# Altium PCB PCB2.PcbDoc
Units mm, origin at the board's own origin, x right, y up, seen from the top; angles counter-clockwise.
Board outline 62.23 x 77.09 mm, 2 copper layers (Top Layer, Bottom Layer); 44 components, 54 nets, 190 pads, 29 vias.
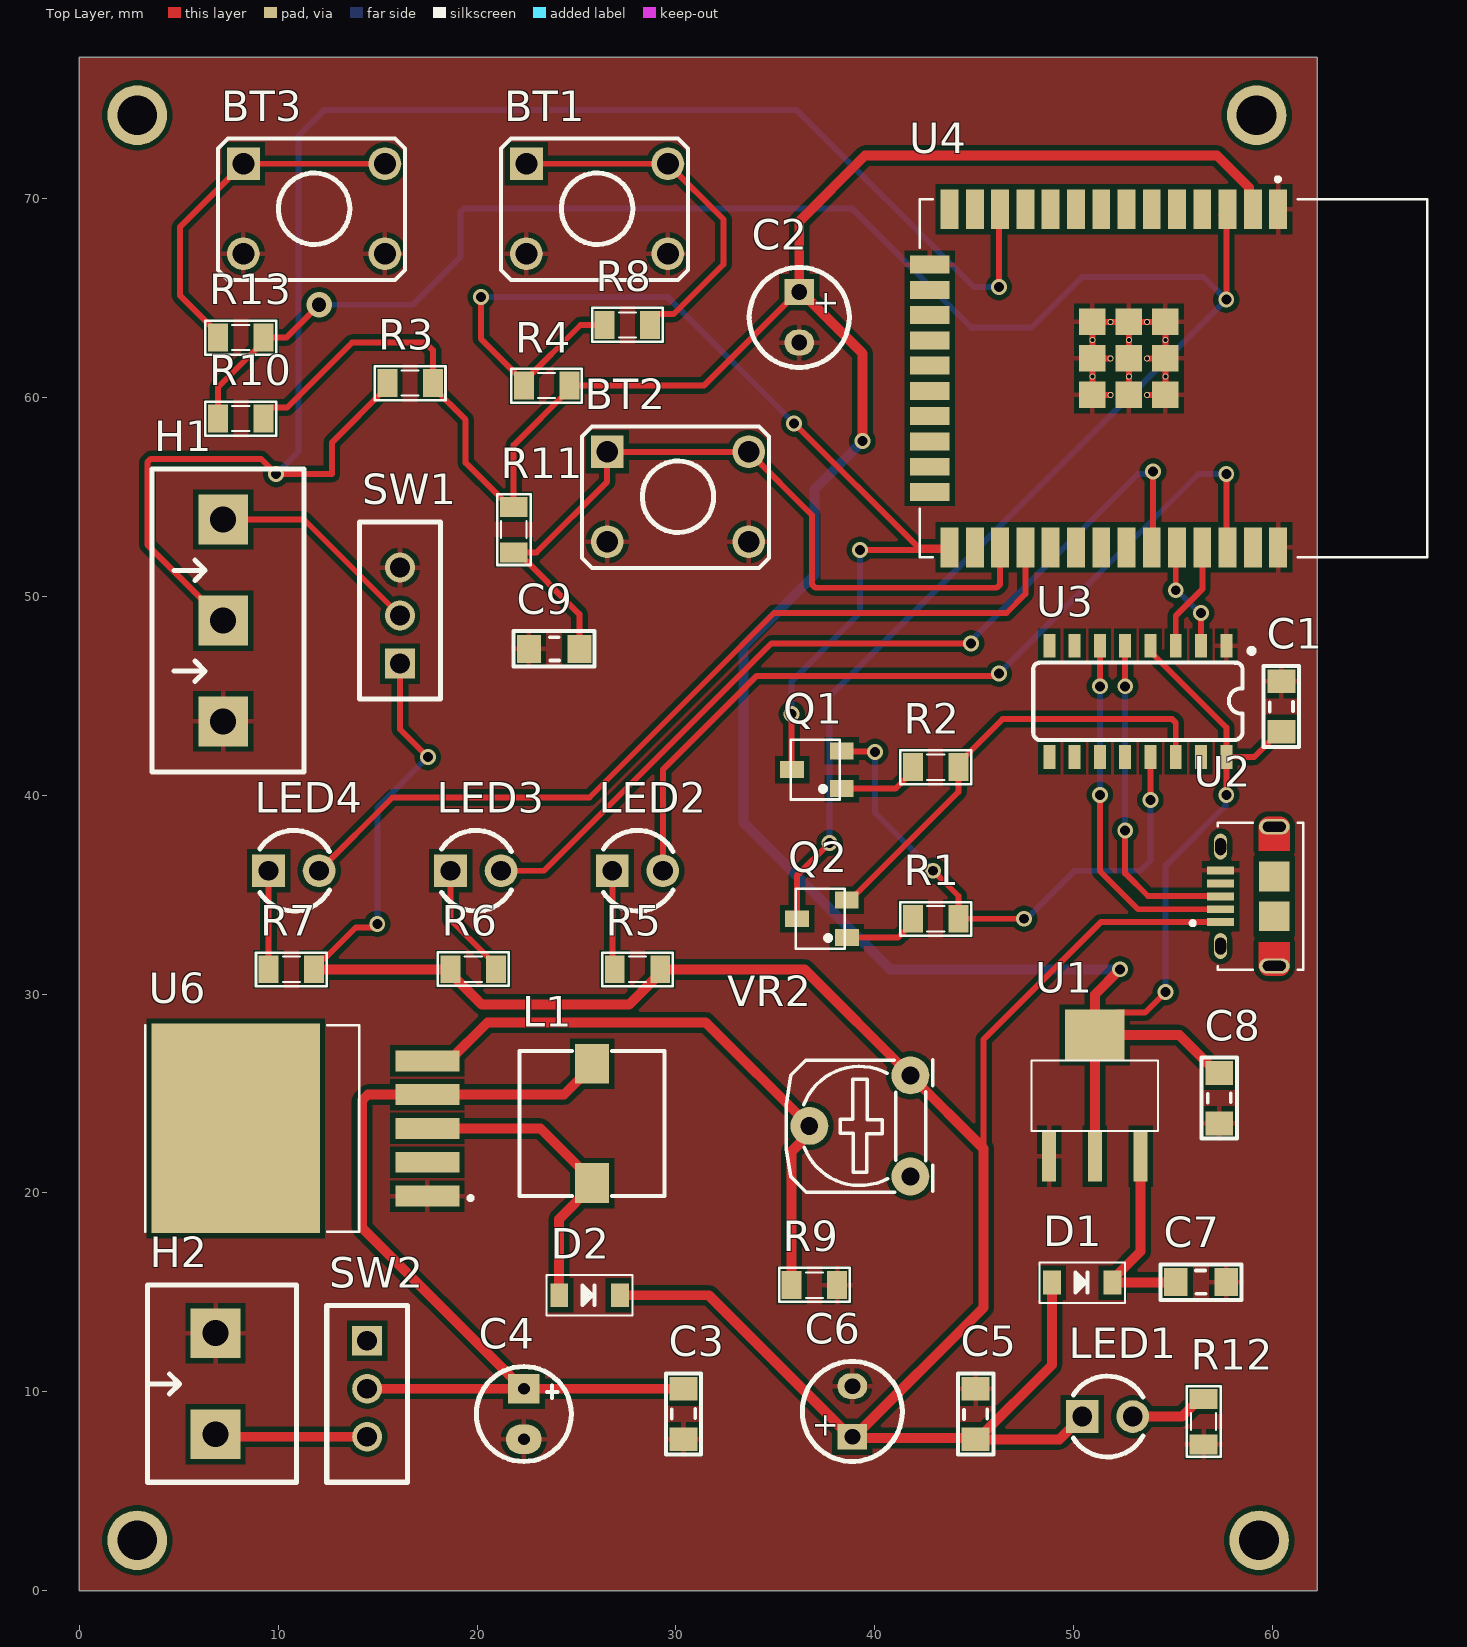
[diagram p0: Top Layer view]
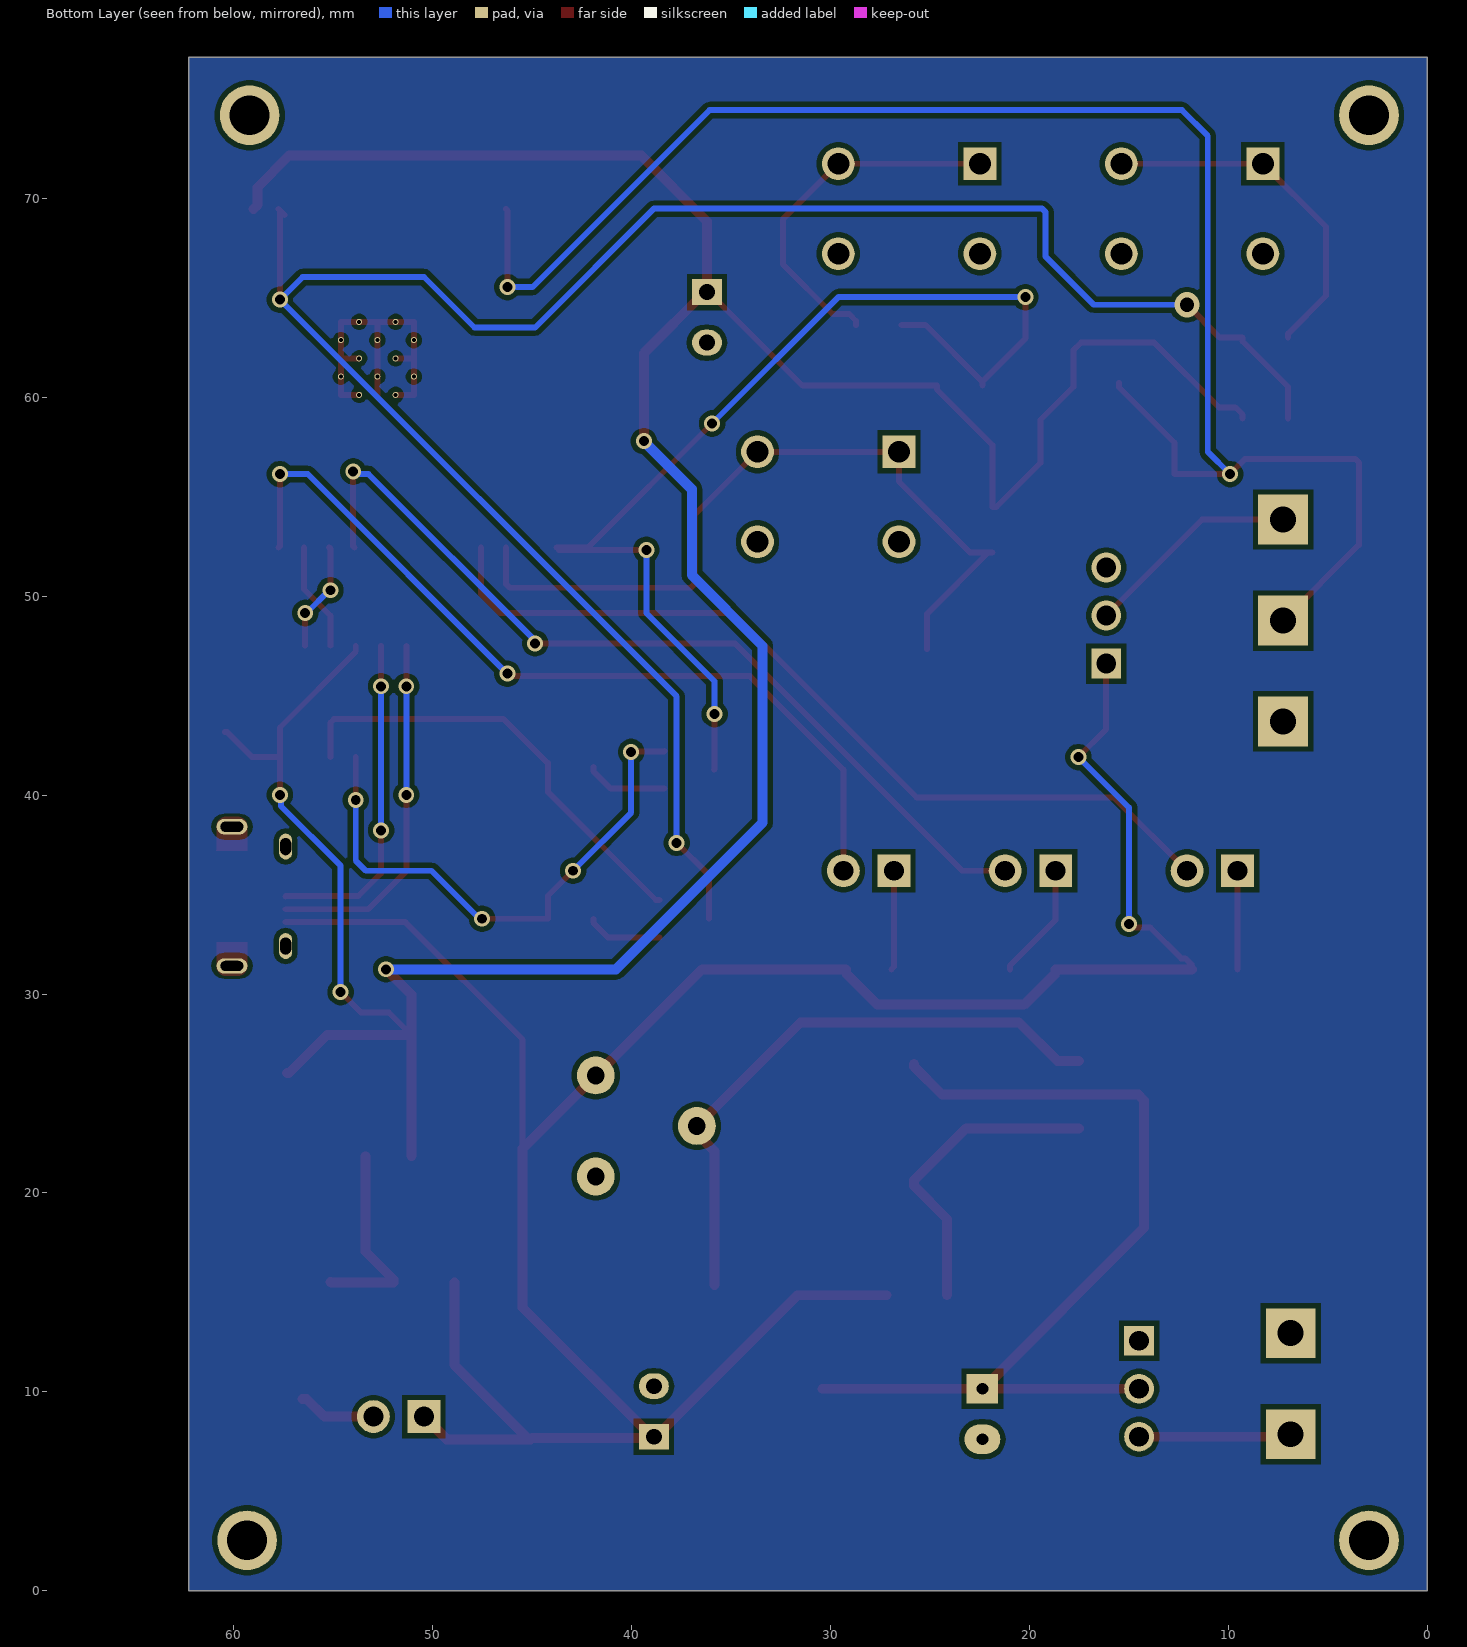
[diagram p1: Bottom Layer view, seen from below]
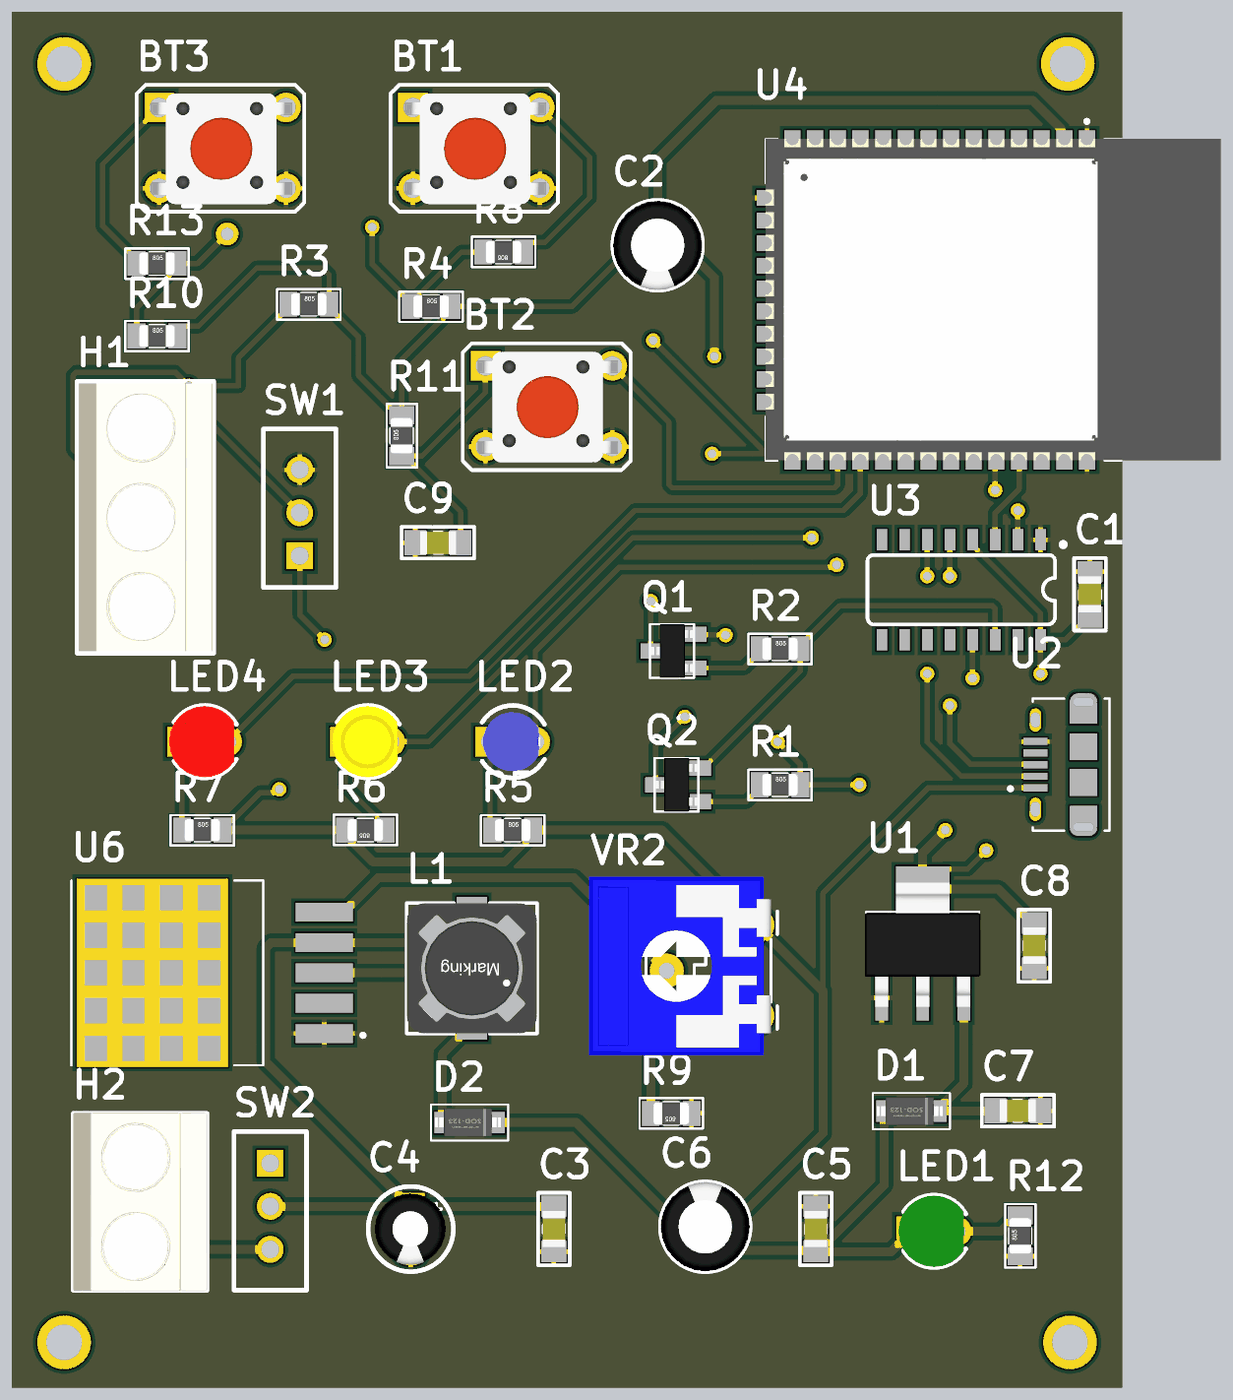
[diagram p2: 3D render of the assembled board from above, using the file's embedded part models]

## Layer stack, top to bottom
Top Solder: solder mask 0.0102, Solder Resist, Dk 3.5
Top Layer: signal copper 0.0356
Dielectric 1: dielectric 0.32, FR-4, Dk 4.8
Bottom Layer: signal copper 0.0356
Bottom Solder: solder mask 0.0102, Solder Resist, Dk 3.5

## Board outline
0,0 62.23,0 62.23,77.089 0,77.089

## Design rules (kind name [scope] priority, off if disabled: settings)
Clearance [All] p1: gap=0.254 ignorepadtopadclearanceinfootprint=FALSE except(0: Arc-Hole Track-Hole SMDPad-Hole THPad-Hole Via-Hole Fill-Hole Poly-Hole Region-Hole Text-Hole)
PolygonConnect [All] p1: connectstyle=Relief reliefconductorwidth=0.254 reliefentries=4 polygonreliefangle="90 Angle" airgapwidth=0.254
RoutingVias [All] p1: holewidth=0.711 width=1.27 viastyle="Through Hole" minholewidth=0.711 minwidth=1.27 maxholewidth=0.711 maxwidth=1.27
SolderMaskExpansion [All] p1: expansion=0.102 istentingtop=FALSE
Width [All] p1: maxlimit=0.8 minlimit=0.3 preferedwidth=0.5
30 further rules are at their usual default settings.

## Components (designator, comment, footprint, x,y, rotation, side; value= is the part's Value field where it differs from the comment)
BT1 "BT" "BUTTON 4 PIN" 26.035,69.469 r0 top value="SW chip 2 pin"
BT2 "BT" "BUTTON 4 PIN" 30.099,54.991 r0 top value="SW chip 2 pin"
BT3 "BT" "BUTTON 4 PIN" 11.811,69.469 r0 top value="SW chip 2 pin"
C1 "100nF" CAP_0805 60.452,44.45 r270 top value=33p
C2 "100uF" C5mm 36.195,64.008 r270 top
C3 "1uF" CAP_0805 30.353,8.89 r90 top value=33p
C4 "47uF" C3MM 22.352,8.89 r270 top
C5 "1uF" CAP_0805 45.085,8.89 r270 top value=33p
C6 "220uF" C5mm 38.862,9.017 r90 top
C7 "10uF" CAP_0805 56.388,15.494 r180 top value=33p
C8 "10uF" CAP_0805 57.277,24.765 r90 top value=33p
C9 "10uF" CAP_0805 23.876,47.371 r0 top value=33p
D1 "1N5822" DIO-SMD-123 50.419,15.494 r180 top value="Diode c?m 1N5408"
D2 "1N5822" DIO-SMD-123 25.654,14.859 r180 top value="Diode c?m 1N5408"
H1 "Header_3" KF3-5.08 7.239,53.848 r270 top
H2 "Header_2" KF2-5.08 6.858,10.414 r90 top
L1 "33uH" L-SMD-M-7.3x4.5 25.781,23.495 r0 top
LED1 "GREEN" LED_GREEN_3MM 51.689,8.763 r0 top value="LED 3 ly Single Colour"
LED2 "BLUE" LED_BLUE_3MM 28.067,36.195 r0 top value="LED 3 ly Single Colour"
LED3 "YELLOW" LED_YELLOW_3MM 19.939,36.195 r0 top value="LED 3 ly Single Colour"
LED4 "RED" LED_RED_3MM 10.795,36.195 r0 top value="LED 3 ly Single Colour"
Q1 "2N222" SOT23D 37.084,41.275 r90 top value=C1815
Q2 "2N222" SOT23D 37.338,33.782 r90 top value=C1815
R1 "12k" RES-SMD-0805 43.053,33.782 r0 top
R2 "12k" RES-SMD-0805 43.053,41.402 r0 top
R3 "4.7k" RES-SMD-0805 16.637,60.706 r0 top
R4 "12k" RES-SMD-0805 23.495,60.579 r0 top
R5 "1k" RES-SMD-0805 28.067,31.242 r0 top
R6 "1k" RES-SMD-0805 19.812,31.242 r180 top
R7 "1k" RES-SMD-0805 10.668,31.242 r0 top
R8 "470" RES-SMD-0805 27.559,63.627 r180 top
R9 "1k" RES-SMD-0805 36.957,15.367 r180 top
R10 "12k" RES-SMD-0805 8.128,58.928 r0 top
R11 "4.7k" RES-SMD-0805 21.844,53.34 r90 top
R12 "1k" RES-SMD-0805 56.515,8.509 r90 top
R13 "470" RES-SMD-0805 8.128,62.992 r0 top
SW1 "500SSP1S2M2QEA" 3pin 16.129,51.308 r90 top
SW2 "500SSP1S2M2QEA" 3pin 14.478,7.874 r270 top
U1 "LM1117" LM1117-SOP 51.054,23.114 r0 top
U2 "Micro_USB" AMPHENOL_10118194-0001LF 60.071,34.909 r90 top
U3 "CH340C" SO016 53.213,44.704 r180 top
U4 "ESP32-WROOM-32" MODULE_ESP32-WROOM-32 55.002,60.948 r270 top
U6 "XL6009" DPAK170P1435X465-6N 11.374,23.241 r180 top
VR2 "10K" VR 41.783,20.828 r90 top value="VR 10K"

## Footprints (in the part's own frame and the unit in brackets; to place one, negate y for a bottom-side part, rotate by r counter-clockwise, add the part's x,y. Pads: shape width x height; smd on the part's side, far side on the other; paste and mask are expansions set on the pad)
3pin [mm]
  rect 1.5x1.5 hole 1: 1(-4.7,0)
  round 1.5 hole 1: 2(-2.286,0) 3(0.127,0)
  silkscreen extent -6.48,-2.03 2.41,2.03
AMPHENOL_10118194-0001LF [mm]
  rect 0.4x1.35 smd: 1(-1.3,2.7) 2(-0.65,2.7) 3(0,2.7) 4(0.65,2.7) 5(1.3,2.7)
  oval 1.3x0.65 hole 0.55 slot 0.85 at 0 deg: S1(-2.5,2.7) S2(2.5,2.7)
  oval 0.775x1.55 hole 0.5 slot 1.15 at 90 deg: S3(-3.5,0) S6(3.5,0)
  rect 1.5x1.55 smd: S4(-1,0) S5(1,0)
  Top Layer region: 192 vertices and 0 holes, not listed, extent -4,-0.775 -2.3,0.78
  Top Layer region: 192 vertices and 0 holes, not listed, extent 2.3,-0.78 4,0.775
  silkscreen extent -3.7,-1.45 3.7,4.2
"BUTTON 4 PIN" [mil] "BUTTON SMORE 280mil x 178mil"
  rect 65x65 hole 43.31: 1(-140,89)
  round 65 hole 43.31: 1(140,89) 2(-140,-89) 2(140,-89)
  silkscreen extent -190,-141 180,139, body extent -159,-124 153,120, height 276
C3MM [mm]
  rect 1.5x1.58 hole 0.6: 1(-1.27,0)
  oval 1.5x1.8 hole 0.6: 2(1.27,0)
  silkscreen extent -2.39,-2.39 2.39,2.39, body extent -2,-2.03 1.99,1.97, height 7.01
C5mm [mm]
  rect 1.3x1.5 hole 0.8: 1(-1.27,0)
  oval 1.3x1.5 hole 0.8: 2(1.27,0)
  silkscreen extent -2.51,-2.51 2.51,2.51, body extent -2.5,-2.5 2.49,2.5, height 11.01
CAP_0805 [mm]
  rect 1.2x1.4 smd: 1(-1.27,-0.025) 2(1.27,-0.025)
  silkscreen extent -2.03,-0.91 2.03,0.86, body extent -1.01,-0.66 1.01,0.61, height 0.61
DIO-SMD-123 [mm]
  rect 0.9x1.2 smd: 1(1.524,0) 2(-1.524,0)
  silkscreen extent -2.16,-1.02 2.16,1.02, body extent -1.76,-0.8 1.94,0.8, height 1.25
DPAK170P1435X465-6N [mm]
  rect 3.21x1.05 smd: 1(-6.13,3.4) 2(-6.13,1.7) 3(-6.13,0) 4(-6.13,-1.7) 5(-6.13,-3.4)
  rect 8.46x10.53 smd paste-6: 6(3.5,0)
  silkscreen extent -8.4,-5.18 8.05,5.18
KF2-5.08 [mm]
  rect 2.5x2.5 hole 1.3: 1(-2.54,0) 2(2.54,0)
  silkscreen extent -4.95,-4.08 4.95,3.43, body extent -5,-4.07 5,3.43, height 10
KF3-5.08 [mm]
  rect 2.5x2.5 hole 1.3: 1(0,0) 2(5.08,0) 3(10.147,0)
  silkscreen extent -2.54,-3.58 12.7,4.06, body extent -2.42,-3.51 12.58,3.99, height 10
L-SMD-M-7.3x4.5 [mm] "WE-PDA SMD Shielded Power Inductor, 7345"
  rect 1.7x2 smd: 1(0,3) 2(0,-3)
  silkscreen extent -3.65,-3.65 3.65,3.65, body extent -3.65,-3.65 3.65,3.65, height 4.05
LED_BLUE_3MM [mil]
  rect 65x65 hole 39.37: 1(-50,0)
  round 65 hole 39.37: 2(50,0)
  silkscreen extent -67,-80 70,80, body extent -66,-65 61,65, height 196
LED_GREEN_3MM [mil]
  rect 65x65 hole 39.37: 1(-50,0)
  round 65 hole 39.37: 2(50,0)
  silkscreen extent -67,-80 70,80, body extent -79,-79 66,79, height 182
LED_RED_3MM [mil]
  rect 65x65 hole 39.37: 1(-50,0)
  round 65 hole 39.37: 2(50,0)
  silkscreen extent -67,-80 70,80, body extent -79,-79 66,79, height 182
LED_YELLOW_3MM [mil]
  rect 65x65 hole 39.37: 1(-50,0)
  round 65 hole 39.37: 2(50,0)
  silkscreen extent -67,-80 70,80, body extent -79,-79 66,79, height 182
LM1117-SOP [mm]
  rect 0.7x2.54 smd: 1(-2.3,-1.27) 2(0,-1.27) 3(2.3,-1.27)
  rect 3x2.54 smd: 2(0,4.826)
  silkscreen extent -3.17,0 3.17,3.56, body extent -3.25,-1.78 3.25,5.18, height 1.68
MODULE_ESP32-WROOM-32 [mm]
  rect 2x0.9 smd: 1(-8.5,5.26) 2(-8.5,3.99) 3(-8.5,2.72) 4(-8.5,1.45) 5(-8.5,0.18) 6(-8.5,-1.09) 7(-8.5,-2.36) 8(-8.5,-3.63) 9(-8.5,-4.9) 10(-8.5,-6.17) 11(-8.5,-7.44) 12(-8.5,-8.71) 13(-8.5,-9.98) 14(-8.5,-11.25) 25(8.5,-11.25) 26(8.5,-9.98) 27(8.5,-8.71) 28(8.5,-7.44) 29(8.5,-6.17) 30(8.5,-4.9) 31(8.5,-3.63) 32(8.5,-2.36) 33(8.5,-1.09) 34(8.5,0.18) 35(8.5,1.45) 36(8.5,2.72) 37(8.5,3.99) 38(8.5,5.26)
  rect 0.9x2 smd: 15(-5.715,-12.25) 16(-4.445,-12.25) 17(-3.175,-12.25) 18(-1.905,-12.25) 19(-0.635,-12.25) 20(0.635,-12.25) 21(1.905,-12.25) 22(3.175,-12.25) 23(4.445,-12.25) 24(5.715,-12.25)
  rect 1.33x1.33 smd: 39_1(-2.835,-0.405) 39_2(-1,-0.405) 39_3(0.835,-0.405) 39_4(-2.835,-2.24) 39_5(-1,-2.24) 39_6(0.835,-2.24) 39_7(-2.835,-4.075) 39_8(-1,-4.075) 39_9(0.835,-4.075)
  round 0.3 hole 0.2: 39_10(-1.917,-0.405) 39_11(-0.082,-0.405) 39_12(-2.835,-1.322) 39_13(-1,-1.322) 39_14(0.835,-1.322) 39_15(-1.917,-2.24) 39_16(-0.082,-2.24) 39_17(-2.835,-3.157) 39_18(-1,-3.157) 39_19(0.835,-3.157) 39_20(-1.917,-4.075) 39_21(-0.082,-4.075)
  silkscreen extent -10.1,-12.75 9,12.75, body extent -9.02,-12.75 8.98,12.75, height 3.2
RES-SMD-0805 [mil]
  rect 39.37x55 smd: 1(-45,0) 2(45,0)
  silkscreen extent -70,-34 70,33, body extent -39,-25 39,25, height 31
SO016 [mm]
  rect 0.6x1.2 smd: 1(-4.445,-2.8) 2(-3.175,-2.8) 3(-1.905,-2.8) 4(-0.635,-2.8) 5(0.635,-2.8) 6(1.905,-2.8) 7(3.175,-2.8) 8(4.445,-2.8) 9(4.445,2.8) 10(3.175,2.8) 11(1.905,2.8) 12(0.635,2.8) 13(-0.635,2.8) 14(-1.905,2.8) 15(-3.175,2.8) 16(-4.445,2.8)
  silkscreen extent -5.84,-2.67 5.26,1.95
SOT23D [mm] "SOT 23C - 1-3-2 - BCE"
  rect 0.85x1.2 smd: 1(-0.95,-1.25) 2(0.94,-1.245) 3(0,1.25)
  silkscreen extent -1.5,-1.14 1.5,1.32, body extent -1.5,-1.17 1.5,1.33, height 1.06
VR [mil] "Resistor Variable"
  round 75 hole 35: 1(0,0) 2(100,200) 3(200,0)
  silkscreen extent -31,-44 231,246, body extent -87,-30 307,372, height 165

## Part data
BT1 BT2 BT3: library part SW2, "Switch button 2 pin"
C1 C3 C5 C7 C8 C9: library part CapSMD, "Capacitor", LatestRevisionDate=17-Jul-2002, LatestRevisionNote="Re-released for DXP Platform.", PackageReference=RAD-0.3, Published=8-Jun-2000, Publisher="Altium Limited"
C2 C4 C6: library part "Cap Pol", "Polarized Capacitor (Axial)", LatestRevisionDate=17-Jul-2002, LatestRevisionNote="Re-released for DXP Platform.", PackageReference=POLAR0.8, Published=8-Jun-2000, Publisher="Altium Limited"
D1 D2: "Schottky Rectifiers"
H1: library part KF3, Manufacturer="Würth Elektronik eiSos GmbH", partNo=691103110003, ComponentLink1 Description=Manufacturer, ComponentLink1URL=http://www.we-online.com, ComponentLink2 Description=Datasheet, ComponentLink2URL=http://katalog.we-online.de/em/datasheet/6911031100xx.pdf, Created by="Karrer Zheng", Created Date="29 October 2013", NoPins=3
H2: library part KF2, Manufacturer="Würth Elektronik eiSos GmbH", partNo=691103110002, ComponentLink1 Description=Manufacturer, ComponentLink1URL=http://www.we-online.com, ComponentLink2 Description=Datasheet, ComponentLink2URL=http://katalog.we-online.de/em/datasheet/6911031100xx.pdf, Created by="Karrer Zheng", Created Date="29 October 2013", NoPins=2
L1: library part L-SMD-1, Inductance="1.0 μH", Manufacturer="Wurth Elektronik", partNo=78477010, ComponentLink1Description=Manufacturer, ComponentLink1URL=http://www.we-online.de, ComponentLink2Description=Datasheet, ComponentLink2URL=http://katalog.we-online.de/pbs/datasheet/78477010.pdf, Created by="Baojun Chen", Created Date=Nov.2015
LED1 LED2 LED3 LED4: library part LED, "LED Single colour Green and Red"
Q1 Q2: "NPN 600mW, ECB"
R1 R2 R3 R4 R5 R6 R7 R8 R9 R10 R11 R12 R13: library part "Resistor - SMD", "Resistor", Manufacturer="Generic Components", Class=Passive, Published=08/06/2000, Publisher="Altium Hobart Technology Centre"
SW1 SW2: "Slide Switch SPDT Through Hole", Package=None, Availability=Unavailable, MP=500SSP1S2M2QEA, Price=None
U1: library part LM1117-ADJ, "800mA Low-Dropout Linear Regulator", Creator="Nguyen Ba Bien", Website=http://group3i.net
U3: "USB to serial chip CH340", Package=Package, Availability=Unavailable, Check_prices=https://www.snapeda.com/parts/CH340C/WCH/view-part/5428851/?ref=eda, MF=WCH, MP=CH340C, Price=None, SnapEDA_Link=https://www.snapeda.com/parts/CH340C/WCH/view-part/5428851/?ref=snap
U4: "Bluetooth, WiFi Transceiver Module 2.4GHz ~ 2.5GHz Surface Mount", Package="Module Espressif Systems", Digi-Key_Part_Number=1904-1010-1-ND, Digi-Key_Purchase_URL=https://www.digikey.com/product-detail/en/espressif-systems/ESP32-WROOM-32/1904-1010-1-ND/8544305?utm_source=snapeda&utm_medium=aggregator&utm_campaign=symbol, MF="Espressif Systems", MP=ESP32-WROOM-32, SnapEDA_Link=https://www.snapeda.com/parts/ESP32-WROOM-32/Espressif%20Systems/view-part/2753322/?ref=snap
U6: "The XL6009 regulator is a wide input range, current mode, DC/DC converter which is capable of generating either positive or negative output voltages.", Package=None, Availability=Unavailable, MP=XL6009, Price=None
VR2: library part VR, "Var Resistor"

## Free pads (board coordinates)
  round 3 hole 2: HOLE(2.921,2.54) HOLE(2.921,74.168) HOLE(59.182,74.168) HOLE(59.309,2.54)

## Via types
v1: diameter 0.8, hole 0.5, Top Layer to Bottom Layer, 28 vias
v2: diameter 1.27, hole 0.711, Top Layer to Bottom Layer, 1 vias

## Nets (pads, with @x,y where several pads share a name; then routed paths per layer and width w, separated by ;. In a path a pad name is that pad's centre, name@x,y a point inside that pad or via, vN(x,y) a via of type N, cw(c..) or ccw(c..) an arc to the next point about the centre after c; other vN are vias at no path point)
CLK: U4.20
CMD: U4.19
D_N: U2.2 U3.6 | length 18.2
  Top Layer w0.3: v1(51.308,40.005) 51.308,36.17 53.219,34.259 U2.2 ; v1(51.308,45.466) U3.6
  Bottom Layer w0.3: v1(51.308,40.005) v1(51.308,45.466)
D_P: U2.3 U3.5 | length 16.7
  Top Layer w0.3: v1(52.578,38.227) 52.578,36.068 53.721,34.925 57.355,34.925 U2.3 ; v1(52.578,45.466) U3.5
  Bottom Layer w0.3: v1(52.578,38.227) v1(52.578,45.466)
DTR: Q1.2 R1.2 U3.13 | length 27.9
  Top Layer w0.3: Q1.2 38.354,42.189 39.98,42.189 v1(40.005,42.164) ; v1(42.926,36.195) 44.196,34.925 R1.2 v1(47.498,33.782) ; v1(53.848,39.751) U3.13
  Bottom Layer w0.3: v1(40.005,42.164) 40.005,39.116 v1(42.926,36.195) ; v1(47.498,33.782) 47.625,33.782 50.038,36.195 53.34,36.195 53.848,36.703 v1(53.848,39.751)
EN: Q2.3 R10.1 R13.2 U4.3 | length 106.3
  Top Layer w0.3: R10.1 6.985,60.508 9.271,62.794 R13.2 10.414,62.992 v2(12.065,64.643) ; Q2.3 36.088,35.961 v1(37.719,37.592) ; U4.3@57.422,69.147 U4.3@57.658,69.384 ; v1(57.658,64.897) U4.3@57.658,69.384 ; U4.3 U4.3@57.658,69.384
  Bottom Layer w0.3: v2(12.065,64.643) 16.764,64.643 19.177,67.056 19.177,69.293 19.353,69.469 38.862,69.469 44.831,63.5 47.879,63.5 50.419,66.04 56.515,66.04 v1(57.658,64.897) 37.719,44.958 v1(37.719,37.592)
GND: BT1.2 BT2.2 BT3.2 C1.1 C2.2 C3.1 C4.2 C5.1 C6.2 C7.1 C8.1 C9.1 H1.3 H2.2 R9.1 R12.1 SW1.3 U1.1 U2.5 U3.1 U4.1 U4.15 U4.38 U4.39_1 U4.39_2 U4.39_3 U4.39_4 U4.39_5 U4.39_6 U4.39_7 U4.39_8 U4.39_9 U4.39_10 U4.39_11 U4.39_12 U4.39_13 U4.39_14 U4.39_15 U4.39_16 U4.39_17 U4.39_18 U4.39_19 U4.39_20 U4.39_21 U6.1 | length 18.4
  Top Layer w0.3: U4.39_19 U4.39_9 U4.39_21 U4.39_8 ; U4.39_18 U4.39_8 ; U4.39_6 U4.39_16 U4.39_5 U4.39_15 U4.39_4 ; U4.39_14 U4.39_3 U4.39_11 U4.39_2 ; U4.39_13 U4.39_2 ; U4.39_8 U4.39_20 U4.39_7 U4.39_17 U4.39_4 ; U4.39_4 U4.39_12 U4.39_1 U4.39_10 U4.39_2
IO0: Q1.3 R4.1 R8.2 U4.25 | length 56.4
  Top Layer w0.3: v1(20.193,65.024) 20.193,62.936 R4.1@22.352,60.777 ; R4.1 R4.1@22.352,60.777 ; R8.2 25.202,63.627 R4.1@22.352,60.777 ; v1(35.814,44.069) 35.814,41.295 Q1.3 ; v1(35.941,58.674) 42.168,52.447 U4.25 43.629,52.324 v1(39.243,52.324)
  Bottom Layer w0.3: v1(20.193,65.024) 29.591,65.024 v1(35.941,58.674) ; v1(35.814,44.069) 35.814,45.72 39.243,49.149 v1(39.243,52.324)
IO2: U4.24
IO4: U4.26
IO5: U4.29
IO12: U4.14
IO13: U4.16
IO14: U4.13
IO15: U4.23
IO16: BT2.1 C9.2 R11.1 U4.27 | length 40.4
  Top Layer w0.3: R11.1 R11.1@22.042,52.197 ; C9.2 25.146,49.093 R11.1@22.042,52.197 ; U4.27 46.292,50.595 46.116,50.419 37.006,50.419 36.83,50.595 36.83,54.077 33.655,57.252 26.543,57.252 26.543,55.753 22.987,52.197 R11.1@22.042,52.197
IO17: LED4.2 U4.28 | length 43.6
  Top Layer w0.3: LED4.2 15.748,39.878 25.654,39.878 34.925,49.149 46.609,49.149 47.562,50.102 U4.28
IO18: U4.30
IO19: U4.31
IO21: LED3.2 U4.33 | length 45
  Top Layer w0.3: LED3.2 23.368,36.195 34.798,47.625 v1(44.831,47.625) ; U4.33 53.975,52.51 v1(53.975,56.261)
  Bottom Layer w0.3: v1(44.831,47.625) 44.831,47.752 53.213,56.134 53.713,56.134 53.84,56.261 v1(53.975,56.261)
IO22: LED2.2 U4.36 | length 43.3
  Top Layer w0.3: LED2.2 29.337,41.275 34.036,45.974 46.101,45.974 v1(46.228,46.101) ; v1(57.658,56.134) 57.658,52.512 U4.36
  Bottom Layer w0.3: v1(46.228,46.101) 56.261,56.134 v1(57.658,56.134)
IO23: U4.37
IO25: U4.10
IO26: U4.11
IO27: H1.2 R3.1 U4.12 | length 85.7
  Top Layer w0.3: H1.2 3.429,52.578 3.429,56.72 3.605,56.896 9.144,56.896 v1(9.906,56.134) 12.7,56.134 12.7,57.714 15.494,60.508 R3.1 ; v1(46.228,65.532) 46.228,69.384 U4.12
  Bottom Layer w0.3: v1(9.906,56.134) 11.026,57.254 11.026,73.129 12.319,74.422 36.068,74.422 44.958,65.532 v1(46.228,65.532)
IO32: U4.8
IO33: U4.9
IO34: U4.6
IO35: U4.7
NetBT1_1: BT1.1 R8.1 | length 18.4
  Top Layer w0.3: BT1.1@22.479,71.73 29.591,71.73 32.385,68.936 32.385,66.675 29.886,64.176 29.052,64.176 28.702,63.825 R8.1
NetBT3_1: BT3.1 R13.1 | length 18
  Top Layer w0.3: R13.1 6.985,63.19 5.08,65.095 5.08,68.555 8.255,71.73 BT3.1@15.367,71.73
NetC7_2: C7.2 D1.2 U1.3 | length 10.1
  Top Layer w0.5: U1.3 53.354,17.055 51.943,15.644 D1.2 51.956,15.507 55.105,15.507 C7.2
NetD2_1: D2.1 L1.2 U6.3 | length 15.8
  Top Layer w0.5: U6.3 23.185,23.241 25.781,20.645 L1.2 25.781,20.345 24.13,18.694 D2.1
NetH2_1: H2.1 SW2.3 | length 7.7
  Top Layer w0.5: H2.1 6.985,7.747 SW2.3
NetLED1_2: LED1.2 R12.2 | length 3.9
  Top Layer w0.5: LED1.2 55.428,8.763 56.317,9.652 R12.2
NetLED2_1: LED2.1 R5.1 | length 5
  Top Layer w0.3: LED2.1 26.797,31.369 R5.1
NetLED3_1: LED3.1 R6.1 | length 5.9
  Top Layer w0.3: LED3.1 18.669,33.727 20.955,31.44 R6.1
NetLED4_1: LED4.1 R7.1 | length 5
  Top Layer w0.3: R7.1 LED4.1
NetQ1_1: Q1.1 R2.1 | length 4.1
  Top Layer w0.3: Q1.1 41.031,40.325 41.91,41.204 R2.1
NetQ2_1: Q2.1 R1.1 | length 3.8
  Top Layer w0.3: Q2.1 41.158,32.832 41.91,33.584 R1.1
NetR9_2: R9.2 U6.5 VR2.2 | length 30.5
  Top Layer w0.5: U6.5 18.584,26.641 20.518,28.575 31.496,28.575 VR2.2 36.703,22.988 35.814,22.099 R9.2
RTS: Q2.2 R2.2 U3.14 | length 23
  Top Layer w0.3: Q2.2 38.758,34.722 44.196,40.16 R2.2 44.196,41.6 46.41,43.815 54.942,43.815 55.118,43.639 U3.14
SD0: U4.21
SD1: U4.22
SD2: U4.17
SD3: U4.18
SVN: U4.5
SVP: U4.4
U0RX: U3.2 U4.34 | length 5.6
  Top Layer w0.3: v1(55.118,50.292) 55.118,52.383 U4.34 ; U3.2 v1(56.388,49.149)
  Bottom Layer w0.3: v1(55.118,50.292) 55.181,50.292 56.325,49.149 v1(56.388,49.149)
U0TX: U3.3 U4.35 | length 5.5
  Top Layer w0.3: U3.3 55.118,49.016 56.452,50.35 U4.35
VBAT: C3.2 C4.1 L1.1 SW2.2 U6.4 | length 46.1
  Top Layer w0.5: SW2.2 C4.1@22.312,10.16 ; L1.1 25.781,26.345 24.377,24.941 U6.4 14.517,24.941 14.224,24.648 14.224,18.248 C4.1@22.312,10.16 ; C3.2 C4.1 C4.1@22.312,10.16
VDD: H1.1 SW1.2 | length 10.9
  Top Layer w0.3: H1.1 11.303,53.848 SW1.2
VDD3V3: C1.2 C2.1 C8.2 R3.2 R4.2 R10.2 R11.2 U1.2 U3.4 U3.16 U4.2 | length 167.6
  Top Layer w0.3: R10.2 9.271,59.126 9.621,59.477 10.455,59.477 13.716,62.738 17.399,62.738 17.78,62.357 R3.2 17.78,60.508 19.431,58.856 19.431,56.697 21.646,54.483 R11.2 21.844,57.587 24.638,60.381 R4.2 31.396,60.579 36.095,65.278 C2.1 ; U1.2@51.054,27.94 52.174,29.06 53.571,29.06 v1(54.61,30.099) ; U3.4 53.848,47.204 57.658,43.394 U3.16 ; v1(57.658,40.005) U3.16 ; C1.2 60.327,43.18 59.051,41.904 U3.16
  Top Layer w0.5: v1(39.37,57.785) 39.37,62.203 36.295,65.278 C2.1 36.195,68.834 39.497,72.136 57.196,72.136 58.792,70.54 58.792,69.648 U4.2 ; U1.2@51.054,21.844 U1.2@51.054,27.94 ; v1(52.324,31.242) 51.054,29.972 U1.2@51.054,27.94 ; C8.2 57.202,26.035 55.297,27.94 U1.2@51.054,27.94
  Bottom Layer w0.3: v1(54.61,30.099) 54.61,36.449 57.611,39.45 57.611,39.958 v1(57.658,40.005)
  Bottom Layer w0.5: v1(39.37,57.785) 36.957,55.372 36.957,51.054 33.401,47.498 33.401,38.608 40.767,31.242 v1(52.324,31.242)
VDD5V: C5.2 C6.1 D1.1 D2.2 LED1.1 R5.2 R6.2 R7.2 SW1.1 U2.1 VR2.3 | length 131.3
  Top Layer w0.3: R7.2 11.811,31.44 12.161,31.791 12.359,31.791 13.911,33.342 14.8,33.342 v1(14.986,33.528) ; SW1.1 16.129,43.307 v1(17.526,41.91) ; 45.466,22.225 45.466,27.721 51.354,33.609 U2.1
  Top Layer w0.5: R7.2 R6.2 18.669,31.044 20.249,29.464 27.63,29.464 28.86,30.693 29.21,31.044 R5.2 36.449,31.242 VR2.3 45.466,22.225 45.466,14.251 38.962,7.747 C6.1 ; D2.2 31.65,14.859 38.762,7.747 C6.1 ; D1.1 48.895,11.355 C5.2@45.16,7.62 ; LED1.1 49.276,7.62 C5.2@45.16,7.62 ; C6.1 38.925,7.683 44.996,7.683 C5.2 C5.2@45.16,7.62
  Bottom Layer w0.3: v1(14.986,33.528) 14.986,39.37 v1(17.526,41.91)
pads on no net: SW2.1 U2.4 U2.S1 U2.S2 U2.S3 U2.S4 U2.S5 U2.S6 U3.7 U3.8 U3.9 U3.10 U3.11 U3.12 U3.15 U4.32 U6.2 U6.6 VR2.1

## Polygon pours and split planes (outlines as drawn)
GND on Top Layer "GND_L01_P001" (solid, pour order 1): 0,77.089 62.23,77.089 62.23,0 0,0
no net on Bottom Layer "NONET_L02_P002" (solid, pour order 2): 0,77.089 62.23,77.089 62.23,0 0,0

## Silkscreen, mask and mechanical layers (free items; w line width, h text height)
Mechanical 1:
  the board outline again, w1.2

## Text inside footprints (layer, text, board x,y; h text height)
C2: Top Overlay "+" at 37.033,65.405 h1.2 r270
C6: Top Overlay "+" at 38.024,7.62 h1.2 r90
U2: Mechanical 13 "PCB END" at 62.171,32.959 h0.5 r90
U4: Mechanical 13 "ANTENNA" at 64.002,66.948 h1.78 r270